# Altium PCB PushButtonPower.PcbDoc
Units mil, origin at the board's own origin, x right, y up, seen from the top; angles counter-clockwise.
Board outline 1075 x 540 mil, 2 copper layers (Top Layer, Bottom Layer); 11 components, 8 nets, 43 pads, 14 vias.
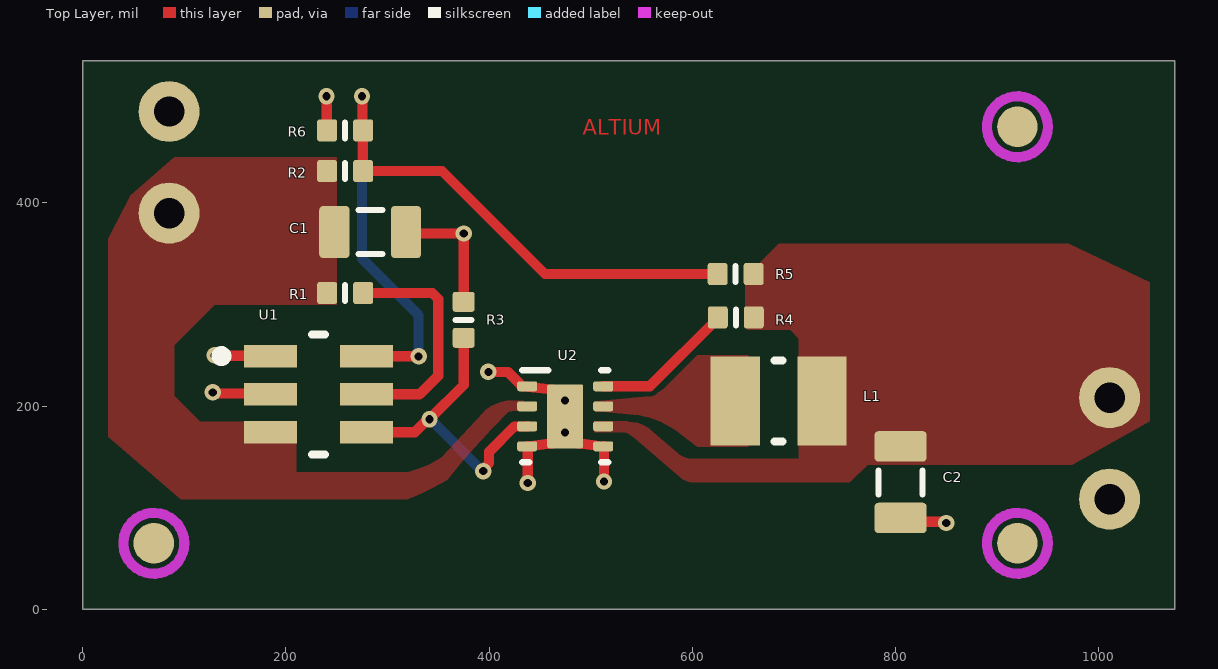
[diagram p0: Top Layer view]
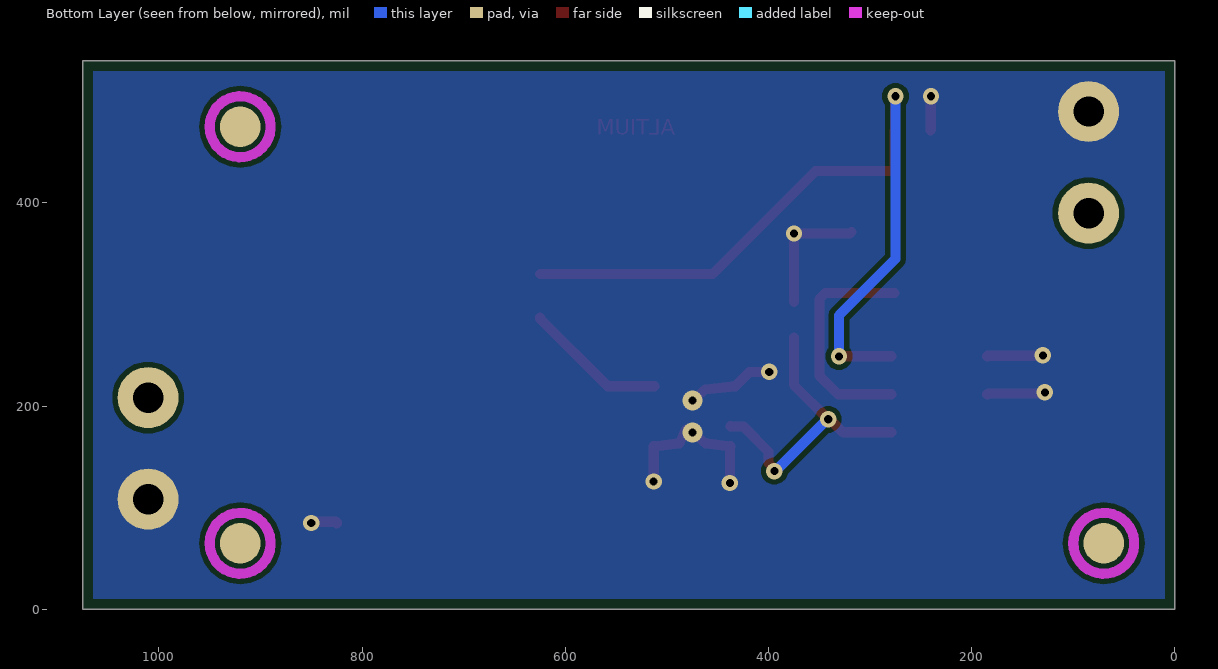
[diagram p1: Bottom Layer view, seen from below]
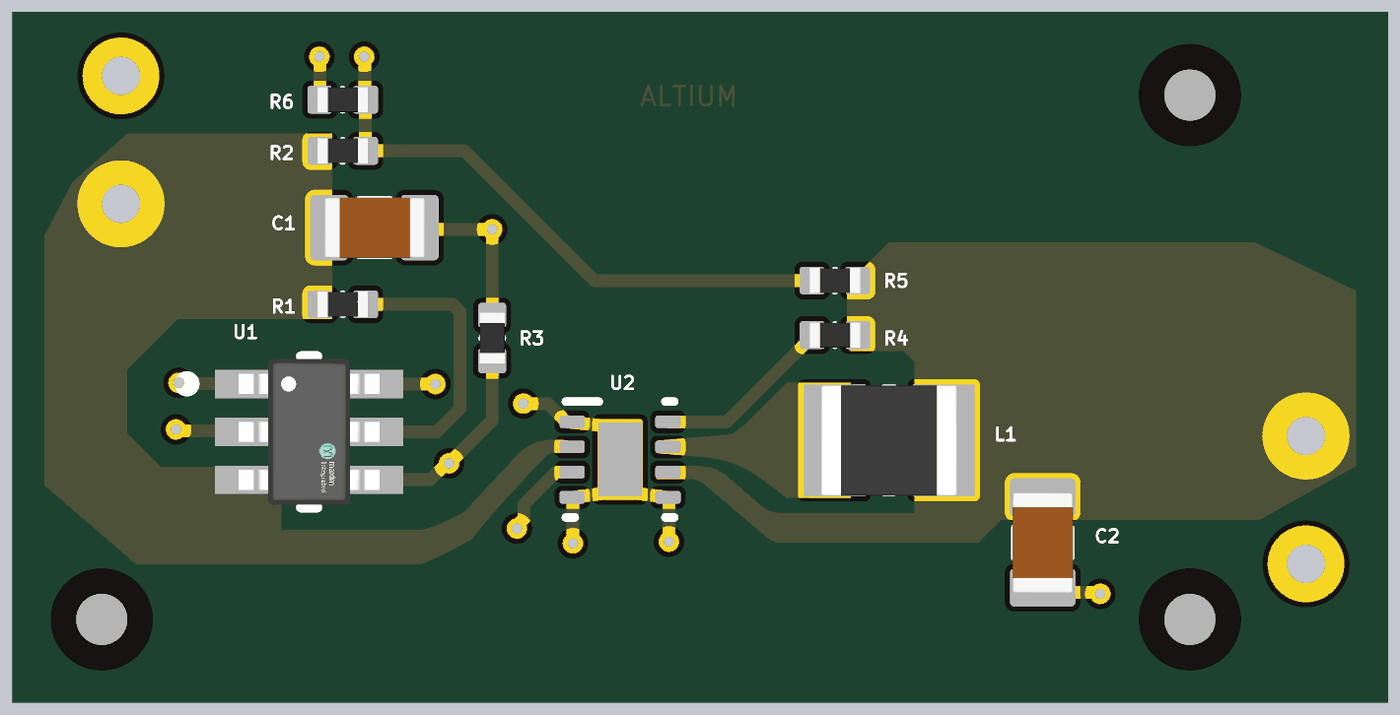
[diagram p2: 3D render of the assembled board from above, using the file's embedded part models]

## Layer stack, top to bottom
Top Solder: solder mask 0.4, Solder Resist, Dk 3.5
Top Layer: signal copper 1.4
Dielectric 1: dielectric 12.6, FR-4, Dk 4.8
Bottom Layer: signal copper 1.4
Bottom Solder: solder mask 0.4, Solder Resist, Dk 3.5

## Board outline
0,0 0,540 1075,540 1075,0

## Design rules (kind name [scope] priority, off if disabled: settings)
BoardOutlineClearance [All] p1: gap=10 ignorepadtopadclearanceinfootprint=FALSE except(0: Arc-SplitContinuation Track-SplitContinuation SMDPad-SplitContinuation THPad-SplitContinuation Via-SplitContinuation Fill-SplitContinuation Poly-SplitContinuation Region-SplitContinuation Text-SplitContinuation)
Clearance [All] p1: gap=5 ignorepadtopadclearanceinfootprint=FALSE
PlaneConnect [InNet('GND')] p1: planeconnectstyle=Relief reliefexpansion=20 reliefentries=4 reliefconductorwidth=10 reliefairgap=10
PolygonConnect [All] p1: connectstyle=Direct reliefconductorwidth=10 reliefentries=4 polygonreliefangle="90 Angle" airgapwidth=10
RoutingVias [All] p1: holewidth=10 width=18 viastyle="Through Hole" minholewidth=0 minwidth=16 maxholewidth=24 maxwidth=40
SolderMaskExpansion [All] p1: expansion=4 istentingtop=FALSE
SupplyNets "Schematic Supply Nets_2" [InNet('+3V3_Dig')] p1: voltage=0.000
SupplyNets "Schematic Supply Nets_1" [InNet('GND')] p2: voltage=0.000
SupplyNets "Schematic Supply Nets" [InNet('V_in')] p3: voltage=0.000
Width [All] p1: maxlimit=10 minlimit=10 preferedwidth=10
29 further rules are at their usual default settings.

## Components (designator, comment, footprint, x,y, rotation, side; value= is the part's Value field where it differs from the comment)
C1 "Capacitor 10µF +/-20% 25V 0805" CAPC0805(2012)145_L 283.21,371.38 r0 top value=10µF
C2 "Capacitor 10µF +/-20% 25V 0805" CAPC0805(2012)145_L 805,125 r270 top value=22uF/35V
L1 "LQM2HPN2R2MG0L" INDC2520X100X60NL20T20 685,205 r0 top value=2.2µH
R1 "Resistor 10K  +/-1 % 0402 63 mW" RESC0402(1005)_L 258.25,311.38 r0 top value=10k
R2 "Resistor 10K  +/-1 % 0402 63 mW" RESC0402(1005)_L 258.25,431.38 r0 top value=10k
R3 "Resistor 10K  +/-1 % 0402 63 mW" RESC0402(1005)_L 375,285 r90 top value=100k
R4 "Resistor 10K  +/-1 % 0402 63 mW" RESC0402(1005)_L 642.77,287.32 r180 top value=100k
R5 "Resistor 10K  +/-1 % 0402 63 mW" RESC0402(1005)_L 642.72,330 r180 top value=100k
R6 "Resistor 10K  +/-1 % 0402 63 mW" RESC0402(1005)_L 258.25,471.38 r180 top value=100k
U1 "MAX16150AUT+T" FP-U6-1-MFG 232,211.65 r0 top
U2 "TPS62162DSGR" DSG0008A_V 474.89,190 r0 top

## Footprints (in the part's own frame and the unit in brackets; to place one, negate y for a bottom-side part, rotate by r counter-clockwise, add the part's x,y. Pads: shape width x height; smd on the part's side, far side on the other; paste and mask are expansions set on the pad)
CAPC0805(2012)145_L [mm] "Chip Capacitor, Body 2.0x1.2mm, Height 1.45mm, IPC High Density"
  rrect25% 0.76x1.3 smd: 1(-0.9,0) 2(0.89,0)
  silkscreen extent -0.3,-0.55 0.3,0.55, body extent -1,-0.6 1,0.6, height 1.45
DSG0008A_V [mm] "SON, 8-Leads, Body 2x2mm, Pitch 0.5mm, Thermal Pad 1.6x0.9mm, TI Recommended"
  rrect40% 0.5x0.25 smd: 1(-0.95,0.75) 2(-0.95,0.25) 3(-0.95,-0.25) 4(-0.95,-0.75) 5(0.95,-0.75) 6(0.95,-0.25) 7(0.95,0.25) 8(0.95,0.75)
  rrect11% 0.9x1.6 smd paste-0.45: 9(0,0)
  silkscreen extent -1.07,-1.15 1.07,1.15, body extent -1.05,-1.05 1.05,1.05, height 0.8
FP-U6-1-MFG [mm]
  rect 1.33x0.56 smd paste+0 mask+0: 1(-1.2,0.95) 2(-1.2,0) 3(-1.2,-0.95) 4(1.2,-0.95) 5(1.2,0) 6(1.2,0.95)
  silkscreen extent -2.55,-1.5 0.16,1.5, body extent -1.96,-1.73 1.96,1.73, height 0.25
INDC2520X100X60NL20T20 [mm] "Chip Inductor, 2-Leads, Body 2.7x2.2mm, IPC Medium Density"
  rect 1.23x2.22 smd: 1(-1.085,0) 2(1.085,0)
  silkscreen extent -0.1,-1.01 0.1,1.01, body extent -1.35,-1.1 1.35,1.1, height 1
RESC0402(1005)_L [mm] "Chip Resistor, Body 1.0x0.5mm, IPC High Density"
  rrect25% 0.5x0.55 smd: 1(-0.45,0) 2(0.45,0)
  silkscreen extent 0,-0.2 0,0.2, body extent -0.5,-0.25 0.5,0.25, height 0.3

## Part data
C1 C2: library part CMP-001-00079-4, "Chip Capacitor, 10µF +/-20%, 25V, 0805, Thickness 1.45 mm", Case/Package=0805, Max Operating Temperature=85°C, Min Operating Temperature=-55°C, Tolerance=10%, Voltage Rating=25V, Mounting Technology=SMT, Pins=2
L1: library part CMP-006-00009-6, "Chip Inductor, 2.2 uH, +/- 20%, -55 to 125 degC, 1008 (2520 Metric), RoHS, Tape and Reel", Case/Package=1008, Current Rating=1.3A, Manufacturer=Murata, Max Operating Temperature=125°C, Min Operating Temperature=-55°C, Package Description="2-Pin Surface Mounted Device, Body 2.5 x 2 mm", Package Quantity=3000, Self Resonant Frequency=40MHz, Tolerance=20%, Core Material=Ferrite, Datasheet URL=http://psearch.en.murata.com/inductor/product/LQM2HPN2R2MG0%23.pdf, Datasheet Version=Aug-16, Mounting Technology=SM, Package Reference=1008, Packaging=TapeandReel, RoHS Compliant=True, Shielding=Shielded
R1 R2 R3 R4 R5 R6: library part CMP-009-00149-3, "Chip Resistor, 10 kOhms, +/-1 %, 63 mW, -55 to 125 degC, 0402", Case/Package=0402, Max Operating Temperature=155°C, Min Operating Temperature=-55°C, Power=63mW, Tolerance=1%, Pins=2
U1: library part CMP-05723-001129-1, "IC SUPERVISOR 1 CHANNEL SOT23-6"
U2: library part CMP-0323-00316-3, "Buck Step Down Regulator with 3 to 17 V Input and 3.3 V Output, -40 to 85 degC, 8-Pin WSON (DSG), Green (RoHS & no Sb/Br)", Manufacturer="Texas Instruments", Rating=Catalog, Switch Current Limit(Typ)(A)=1.8, Code_JEDEC=MO-229, ComponentLink1Description=Datasheet, ComponentLink1URL=http://www.ti.com/general/docs/lit/getliterature.tsp?genericPartNumber=TPS62162&fileType=pdf, ComponentLink2Description="Package Specification", ComponentLink2URL=http://www.ti.com/litv/pdf/mpds308a, ComponentLink3Description="URL Link1", ComponentLink3URL="Samples URL:http://www.ti.com/product/tps62162#samples", DatasheetVersion=SLVSAM2A, Duty Cycle(Max)(%)=100, Eco-Plan="Green (RoHS & no Sb/Br)", Iout(Max)(A)=1, Iq(Typ)(mA)=0.017, Mounting Technology="Surface Mount", PackageDescription="8-Pin Plastic Small Outline No-Lead, 2 x 2 x 0.8 mm Body, 0.5 mm Pitch, Exposed Pad", PackageReference=DSG0008A, PackageVersion="revB, Oct-2010", PartNumber=TPS62162DSGR, Preset Vout(V)=3.3, Regulated Outputs(#)=1, SubFamily="Step-Down Regulator", Synchronous Rectification=TRUE, Topology=Buck, Vin(Max)(V)=17, Vin(Min)(V)=3, Vout(Max)(V)=3.3, Vout(Min)(V)=3.3

## Free pads (board coordinates)
  round 60 hole 30: 2(85,390) 2(85,490) 2(1010.67,108.43) 2(1010.67,208.43)
  round 40 smd mask+20: 3(70,65) 3(920,65) 3(920,475)
  round 40 smd far side mask+20: 3(70,65) 3(920,65) 3(920,475)

## Via types
v1: diameter 16, hole 8, Top Layer to Bottom Layer, 12 vias
v2: diameter 19.68, hole 7.87, Top Layer to Bottom Layer, 2 vias

## Nets (pads, with @x,y where several pads share a name; then routed paths per layer and width w, separated by ;. In a path a pad name is that pad's centre, name@x,y a point inside that pad or via, vN(x,y) a via of type N, cw(c..) or ccw(c..) an arc to the next point about the centre after c; other vN are vias at no path point)
+3V3_Dig: C2.1 L1.2 pad.2@1010.67,208.43 R4.1 R5.1 U2.6
+3V3_EN: R3.1 U1.4 U2.3 | length 304.9
  Top Layer w10: U1.4 326.81,174.25 339.61,187.05 v1(341.24,187.05) 375,220.82 R3.1 ; v1(394.25,136.04) 394.25,138.21 400,143.96 400,155.14 424.93,180.07 U2.3
  Bottom Layer w10: v1(341.24,187.05) 342.24,187.05 393.25,136.04 v1(394.25,136.04)
GND: C1.2 C2.2 pad.2@85,490 pad.2@1010.67,108.43 R3.2 R6.2 U1.1 U1.2 U2.1 U2.4 U2.5 U2.9 | length 535.4
  Top Layer w10: v1(128.03,213.55) 128.98,212.6 183.8,212.6 U1.2 ; v1(130,250) 130.47,249.53 184.28,249.53 U1.1 ; v1(240,505) 240.27,504.73 240.27,471.64 R6.2 ; C1.2 319.63,370 v1(375,370) R3.2 ; v1(399.28,233.74) 418.5,233.75 432.72,219.53 462.17,216.5 v2(474.89,205.75) ; U2.4 462.17,163.5 v2(474.89,174.25) ; U2.4@437.95,160.47 438.03,160.39 v1(438.03,124.47) ; U2.9@481.12,177.02 487.6,163.5 U2.5 ; U2.5@512.94,160.47 513.02,160.39 v1(513.02,125.82) ; C2.2@825,84.65 825,85.56 825.59,86.15 848.85,86.15 v1(850,85)
NetL1_1: L1.1 U2.7
NetR1_2: R1.2 U1.5 | length 230.3
  Top Layer w10: R1.2 344.08,311.38 349.94,305.52 349.94,229.94 331.65,211.65 U1.5
NetR4_2: R4.2 U2.8 | length 141.4
  Top Layer w10: U2.8 558.24,219.53 625.05,286.34 R4.2
V_in: C1.1 pad.2@85,390 R1.1 R2.1 U1.3 U2.2
Vmon1: R2.2 R5.2 R6.1 U1.6 | length 795.5
  Top Layer w10: v1(275,505) 275.48,504.52 275.48,471.86 R6.1 R2.2 353.62,431.38 455,330 R5.2 ; U1.6@279.25,249.04 v1(330.64,249.03)
  Bottom Layer w10: v1(275,505) 275,345 330.64,289.36 v1(330.64,249.03)

## Polygon pours and split planes (outlines as drawn)
+3V3_Dig on Top Layer "+3V3_DIG_L01_P006" (solid, pour order 6): 685,360 664.34,339.34 651.91,339.34 651.91,277.67 654.58,275 696.35,275 705,266.35 705,148.24 599.49,148.24 cw(c600.28,171.42) 585.09,153.89 558.69,176.76 ccw(c536.75,151.47) 536.71,184.96 503.27,184.96 503.27,174.54 532.2,174.54 cw(c527.57,153.13) 543.19,168.51 590.25,128.58 ccw(c600,140.08) 600,125 755,125 772.56,142.56 875,142.56 973.86,142.56 1050,184.96 1050,321.87 970.56,360
V_in on Top Layer "V_IN_L01_P000" (solid, remove dead copper, pour order 0): 250,445 250,300 130,300 90,260 90,210 115.53,184.47 191.27,184.47 210,184.47 210.35,135 240.74,135 320,135 ccw(c290.46,248.63) 353.61,149.65 394.16,193.3 cw(c422.14,167.32) 422.99,205.49 444.81,205.01 445.05,200 445.05,195.24 422.89,195.24 ccw(c422.87,187.84) 417.34,192.76 ccw(c641.73,-42.49) 394.16,168.23 ccw(c765.7,-188.16) 359.22,127.8 cw(c188.01,422.93) 319.68,108.17 96.7,108.17 25,170 25,365 47.5,407.5 90,445
NetL1_1 on Top Layer "NETL1_1_L01_P014" (solid, pour order 14): 655,250 655,160 605,160 583.57,176.05 ccw(c535.64,112.06) 542.25,191.74 503,195 503,204.74 552.2,209.03 ccw(c549.1,244.63) 574.37,219.37 605,250
GND on Bottom Layer "GND_L02_P012" (solid, pour order 12): 0,540 1075,540 1075,0 0,0

## Keep-outs
Top Layer:
  circle w10: c70,65 r30
  circle w10: c920,65 r30
  circle w10: c920,475 r30
Bottom Layer:
  circle w10: c920,65 r30
  circle w10: c920,475 r30
  circle w10: c70,65 r30

## Other copper
Top Layer:
  text "ALTIUM" at 492,467 h15